# Altium PCB Cabinet_Device.PcbDoc (part 3 of 4)
Units mil, origin at the board's own origin, x right, y up, seen from the top; angles counter-clockwise.
Board outline 17790 x 10695 mil, 4 copper layers (Top Layer, Ground, Internal Plane 1, Bottom Layer), stack 30.634 mil thick; 515 components, 346 nets, 1467 pads, 176 vias.
Unrouted connection lines stored in the file: 677.
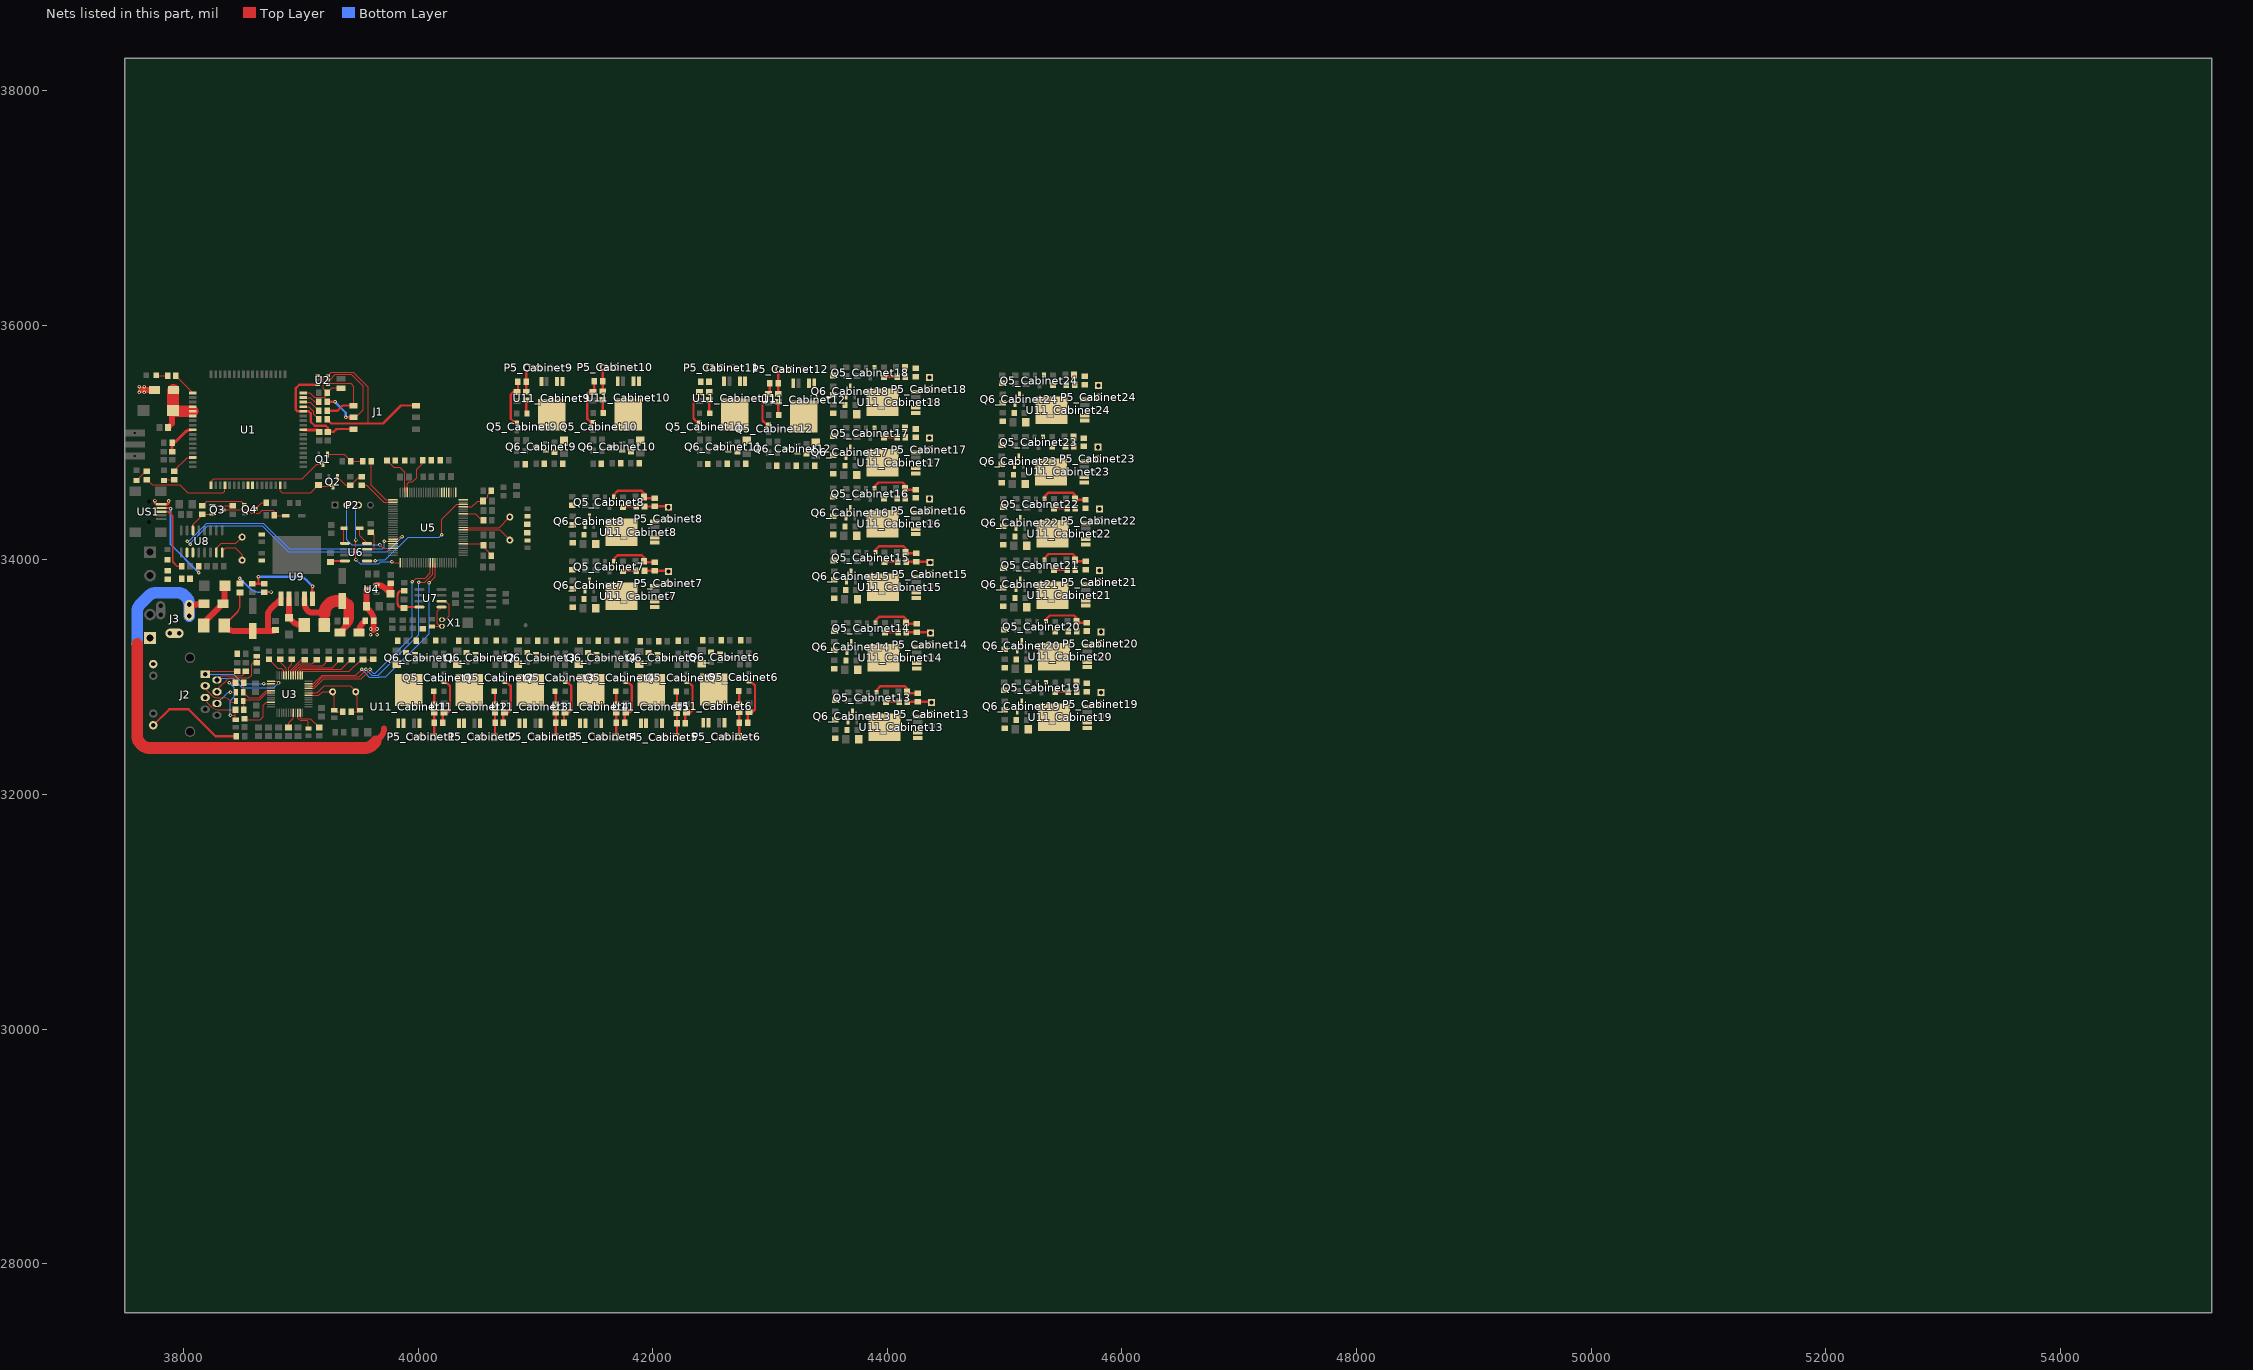
[diagram p5: the nets of this part, all layers, seen from the top]

## Via types
v1: diameter 30, hole 15, Top Layer to Bottom Layer, 176 vias

## Nets (pads, with @x,y where several pads share a name; then routed paths per layer and width w, separated by ;. In a path a pad name is that pad's centre, name@x,y a point inside that pad or via, vN(x,y) a via of type N, cw(c..) or ccw(c..) an arc to the next point about the centre after c; other vN are vias at no path point) (continued)
NetC2_1: C2.1 R1.2 U1.60 | length 289
  Top Layer w10: U1.60@38063,35107.91 U1.60@38077.56,35107.91
  Top Layer w25: C2.1@37902.43,34924.91 R1.2@37902.43,34999 ccw(c37902.43,35053.48) 37940.96,35014.96 38013.35,35087.35 cw(c38063,35037.69) U1.60@38063,35107.91
NetC3_1: C3.1 C4.1 D1.2 U1.55 U1.56 U1.57 | length 498.1
  Top Layer w50: C4.1@37869.4,35128 37902.4,35161 37902.4,35264.33 C3.1@37910.98,35272.91
  Top Layer w100: C3.1@37910.98,35272.91 37910.98,35443.19 D1.2@37915.71,35447.91 ; C3.1@37918.5,35265.39 U1.56@38077.56,35265.39
NetC5_1: C5.1 Q2.3 U1.16 | length 534.8
  Top Layer w10: U1.16@38825.59,34635.47 38825.59,34590.41 38843,34573 39084.06,34573 C5.1@39150,34638.94 39163.94,34625 Q2.3@39275,34625
NetC6_1: C6.1 U1.26 | length 141.4
  Top Layer w25: U1.26@39022.44,35107.91 39140.49,35107.91 C6.1@39157,35091.4
NetC14_1: C14.1 R20.2 R42.1 U3.37 | length 673.3
  Top Layer w10: U3.37@39013.7,33014.45 39013.7,33039.7 39023,33049 39413,33049 39513.57,33149.57 39535.43,33149.57 39613.46,33149.57 R20.2@39615.43,33147.6
NetC15_2: C15.2 R26.1 U3.30 Y1.1 | length 550.2
  Top Layer w10: U3.30@39085,32845.16 39155.16,32845.16 39186.18,32876.18 39285.43,32876.18 39285.43,32761.5 ; Y1.1@39285,32858.57 C15.2@39285,32716.5 39298.5,32703 R26.1@39359.57,32703
NetC16_2: C16.2 R26.2 U3.31 Y1.2 | length 693.4
  Top Layer w10: U3.31@39064.88,32864.84 39139.84,32864.84 39200,32925 39420,32925 39483,32862 C16.2@39483,32716.5 ; R26.2@39430.43,32703 39484.5,32703 C16.2@39502,32720.5
NetC17_2: C17.2 U3.22 | length 204
  Top Layer w10: U3.22@38974.33,32695.55 38974.33,32650.67 38995,32630 39050,32630 39065.43,32614.57 C17.2@39065.43,32561.5
NetC18_1: C18.1 U3.20 | length 143.3
  Top Layer w10: C18.1@38895.43,32568.64 38895.43,32610.43 38934.96,32649.96 U3.20@38934.96,32695.55
NetC19_2: C19.2 J2.4 R28.1 | length 562.6
  Top Layer w10: J2.4@38285.35,32875.24 38285.35,32890.35 38389,32994 38558,32994 38580,33016 38580,33109 38591.43,33120.43 R28.1@38625,33120.43 C19.2@38625,33178.5
NetC20_2: C20.2 J2.3 | length 327.9
  Top Layer w10: J2.3@38185.35,32925.24 ccw(c38247.13,32925.24) 38203.45,32881.55 38240,32845 ccw(c38288.28,32893.28) 38288.28,32825 38336.89,32825 cw(c38336.89,32744.71) 38365.13,32819.87 cw(c38336.89,32744.71) 38393.67,32801.48 38399.65,32795.5 ccw(c38425,32820.85) 38425,32785 ccw(c38425,32811.61) 38443.82,32792.79 C20.2@38447.26,32796.24
NetC21_2: C21.2 J2.6 | length 208.9
  Top Layer w10: v1(38400,32870) cw(c38402.98,32867.02) 38402.98,32871.24 C21.2@38447.26,32871.24
  Bottom Layer w10: J2.6@38285.35,32775.24 38362.52,32852.41 cw(c38405,32809.93) 38405,32870 v1(38400,32870)
NetC23_2: C23.2 J2.5 R32.1 R33.1 | length 797.1
  Top Layer w10: J2.5@38185.35,32825.24 ccw(c38247.13,32825.24) 38203.45,32781.55 38234.47,32750.53 ccw(c38305.19,32821.24) 38305.19,32721.24 R32.1@38443.32,32721.24 38443.32,32675 ; v1(38391.24,32951.24) R33.1@38443.32,32951.24 ; v1(38400,32675) 38443.32,32675 ; C23.2@38451.35,32637.73 38443.32,32645.76 38443.32,32675
  Bottom Layer w10: v1(38391.24,32951.24) 38431.24,32911.24 38431.24,32831.24 38400,32800 v1(38400,32675)
NetC24_1: C24.1 R36.2 U5.6 | length 296
  Top Layer w10: U5.6@40384.21,34137.2 40543.39,34137.2 C24.1@40556.6,34124 40556.6,34112.4 40624.43,34044.57 R36.2@40624.43,34034
NetC31_1: C31.1 LR5.2 U5.22 | length 306
  Top Layer w10: U5.22@40384.21,34452.17 40458.17,34452.17 40507,34501 C31.1@40554.6,34501 40592,34538.4 40592,34553.57 LR5.2@40625.43,34587
NetC35_1: C35.1 R39.2 U7.8 | length 357
  Top Layer w20: R39.2@39880,33734.57 39851.03,33734.57 ccw(c39851.03,33718.97) 39840,33730 ccw(c39876.21,33693.79) 39825,33693.79 39825,33629.14 ccw(c39859.14,33629.14) 39835,33605 ccw(c39877.01,33647.01) 39877.01,33587.6 C35.1@39880,33587.6 39889.4,33597 U7.8@40010.51,33597
NetC36_1: C36.1 U7.1 X1.2 | length 269.1
  Top Layer w10: C36.1@40121.5,33434 X1.2@40203,33434 ; X1.2@40184,33434 40162,33456 40162,33559.51 U7.1@40199.49,33597
NetC37_2: C37.2 R41.1 U6.4 | length 113.1
  Top Layer w20: C37.2@39262.4,33990 U6.4@39375.51,33990
NetC39_1: C39.1 U8.8 Y3.1 | length 265.9
  Top Layer w10: U8.8@38330,34061.51 38330,34074 38359,34103 38440,34103 38500,34043 Y3.1@38500,33996.5
NetC40_1: C40.1 U8.7 Y3.2 | length 296.6
  Top Layer w10: U8.7@38280,34061.51 38280,34099 38321,34140 38446.5,34140 Y3.2@38500,34193.5
NetC41_1: C41.1 C45.1 D5.1 L2.2 U9.4 | length 1068.5
  Top Layer w50: U9.4@39031.93,33668.78 39031.93,33632.77 ccw(c39127.77,33632.77) 39060,33565 ccw(c39096.21,33601.21) 39096.21,33550 39175,33550 ; D5.1@39334.29,33380 D5.1@39358.11,33403.82 ; D5.1@39358.11,33403.82 ccw(c39287.4,33474.53) 39387.4,33474.53 C45.1@39387.4,33480 39387.4,33574.88 ccw(c39287.4,33574.88) 39358.11,33645.59 C41.1@39355,33648.7 39374.85,33648.7 cw(c39374.85,33584.85) 39420,33630 cw(c39395.86,33605.86) 39430,33605.86 39430,33517.13 cw(c39330,33517.13) 39400.71,33446.42 D5.1@39358.11,33403.82
  Top Layer w100: L2.2@39201.61,33445 L2.2@39201.61,33446.96 ; 39201.61,33540.23 cw(c39313.59,33540.23) 39234.41,33619.41 cw(c39305.12,33548.7) 39305.12,33648.7 C41.1@39355,33648.7
NetC42_1: C42.1 C43.1 C44.1 L1.2 U9.1 | length 1107.3
  Top Layer w12: L1.2@38346.61,33440 38450.71,33544.1 ccw(c38380,33614.81) 38480,33614.81 C42.1@38480,33722.6
  Top Layer w50: L1.2@38346.61,33440 38363.62,33422.99 ccw(c38434.33,33493.7) 38434.33,33393.7 C43.1@38590,33393.7 38763.52,33393.7 ccw(c38763.52,33424.08) C44.1@38785,33402.6 ; 38720,33393.7 38720,33528.58 cw(c38790.15,33528.58) 38740.55,33578.19 U9.1@38831.14,33668.78
NetC42_2: C42.2 R55.1 | length 414
  Top Layer w12: C42.2@38480,33797.4 v1(38480,33842.93) ; R55.1@38690,33724.57 v1(38746.88,33724.57)
  Bottom Layer w12: v1(38480,33842.93) 38569.07,33753.86 ccw(c38639.78,33824.57) 38639.78,33724.57 v1(38746.88,33724.57)
NetC48_Cabinet1_1: C48_Cabinet1.1 Q5_Cabinet1.1 R59_Cabinet1.1 | length 424.3
  Top Layer w20: R59_Cabinet1.1@40209.87,32609 40209.87,32689.03 C48_Cabinet1.1@40219.43,32698.6 40251.03,32698.6 40271.43,32719 40271.43,32925 40238.83,32957.6 Q5_Cabinet1.1@40220.68,32957.6
NetC48_Cabinet2_1: C48_Cabinet2.1 Q5_Cabinet2.1 R59_Cabinet2.1 | length 424.3
  Top Layer w20: R59_Cabinet2.1@40726.87,32609 40726.87,32689.03 C48_Cabinet2.1@40736.43,32698.6 40768.03,32698.6 40788.43,32719 40788.43,32925 40755.83,32957.6 Q5_Cabinet2.1@40737.68,32957.6
NetC48_Cabinet3_1: C48_Cabinet3.1 Q5_Cabinet3.1 R59_Cabinet3.1 | length 424.3
  Top Layer w20: R59_Cabinet3.1@41243.87,32609 41243.87,32689.03 C48_Cabinet3.1@41253.43,32698.6 41285.03,32698.6 41305.43,32719 41305.43,32925 41272.83,32957.6 Q5_Cabinet3.1@41254.68,32957.6
NetC48_Cabinet4_1: C48_Cabinet4.1 Q5_Cabinet4.1 R59_Cabinet4.1 | length 424.3
  Top Layer w20: R59_Cabinet4.1@41760.87,32609 41760.87,32689.03 C48_Cabinet4.1@41770.43,32698.6 41802.03,32698.6 41822.43,32719 41822.43,32925 41789.83,32957.6 Q5_Cabinet4.1@41771.68,32957.6
NetC48_Cabinet5_1: C48_Cabinet5.1 Q5_Cabinet5.1 R59_Cabinet5.1 | length 424.3
  Top Layer w20: R59_Cabinet5.1@42277.87,32607.49 42277.87,32687.52 C48_Cabinet5.1@42287.43,32697.09 42319.03,32697.09 42339.43,32717.49 42339.43,32923.49 42306.83,32956.09 Q5_Cabinet5.1@42288.68,32956.09
NetC48_Cabinet6_1: C48_Cabinet6.1 Q5_Cabinet6.1 R59_Cabinet6.1 | length 424.3
  Top Layer w20: R59_Cabinet6.1@42809.87,32612.49 42809.87,32692.52 C48_Cabinet6.1@42819.43,32702.09 42851.03,32702.09 42871.43,32722.49 42871.43,32928.49 42838.83,32961.09 Q5_Cabinet6.1@42820.68,32961.09
NetC48_Cabinet7_1: C48_Cabinet7.1 Q5_Cabinet7.1 R59_Cabinet7.1 | length 424.3
  Top Layer w20: Q5_Cabinet7.1@41667.91,33988.68 41667.91,34006.83 41700.51,34039.43 41906.51,34039.43 41926.91,34019.03 C48_Cabinet7.1@41926.91,33987.43 41936.48,33977.87 R59_Cabinet7.1@42016.51,33977.87
NetC48_Cabinet8_1: C48_Cabinet8.1 Q5_Cabinet8.1 R59_Cabinet8.1 | length 424.3
  Top Layer w20: Q5_Cabinet8.1@41667.91,34536.68 41667.91,34554.83 41700.51,34587.43 41906.51,34587.43 41926.91,34567.03 C48_Cabinet8.1@41926.91,34535.43 41936.48,34525.87 R59_Cabinet8.1@42016.51,34525.87
NetC48_Cabinet9_1: C48_Cabinet9.1 Q5_Cabinet9.1 R59_Cabinet9.1 | length 424.3
  Top Layer w20: Q5_Cabinet9.1@40840.32,35169.91 40822.17,35169.91 40789.57,35202.51 40789.57,35408.51 40809.97,35428.91 C48_Cabinet9.1@40841.57,35428.91 40851.13,35438.48 R59_Cabinet9.1@40851.13,35518.51
NetC48_Cabinet10_1: C48_Cabinet10.1 Q5_Cabinet10.1 R59_Cabinet10.1 | length 424.3
  Top Layer w20: Q5_Cabinet10.1@41491.32,35172.91 41473.17,35172.91 41440.57,35205.51 41440.57,35411.51 41460.97,35431.91 C48_Cabinet10.1@41492.57,35431.91 41502.13,35441.48 R59_Cabinet10.1@41502.13,35521.51
NetC48_Cabinet11_1: C48_Cabinet11.1 Q5_Cabinet11.1 R59_Cabinet11.1 | length 270.3
  Top Layer w20: 42347.57,35409.51 42347.57,35203.51 42380.17,35170.91 Q5_Cabinet11.1@42398.32,35170.91
NetC48_Cabinet12_1: C48_Cabinet12.1 Q5_Cabinet12.1 R59_Cabinet12.1 | length 424.3
  Top Layer w20: Q5_Cabinet12.1@42987.32,35154.91 42969.17,35154.91 42936.57,35187.51 42936.57,35393.51 42956.97,35413.91 C48_Cabinet12.1@42988.57,35413.91 42998.13,35423.48 R59_Cabinet12.1@42998.13,35503.51
NetC48_Cabinet13_1: C48_Cabinet13.1 Q5_Cabinet13.1 R59_Cabinet13.1 | length 424.3
  Top Layer w20: Q5_Cabinet13.1@43909.43,32872.44 43909.43,32890.6 43942.02,32923.2 44148.02,32923.2 44168.43,32902.79 C48_Cabinet13.1@44168.43,32871.2 44177.99,32861.63 R59_Cabinet13.1@44258.02,32861.63
NetC48_Cabinet14_1: C48_Cabinet14.1 Q5_Cabinet14.1 R59_Cabinet14.1 | length 424.3
  Top Layer w20: Q5_Cabinet14.1@43900.4,33464.68 43900.4,33482.83 43933,33515.43 44139,33515.43 44159.4,33495.03 C48_Cabinet14.1@44159.4,33463.43 44168.97,33453.87 R59_Cabinet14.1@44249,33453.87
NetC48_Cabinet15_1: C48_Cabinet15.1 Q5_Cabinet15.1 R59_Cabinet15.1 | length 424.3
  Top Layer w20: Q5_Cabinet15.1@43897.91,34065.68 43897.91,34083.83 43930.51,34116.43 44136.51,34116.43 44156.91,34096.03 C48_Cabinet15.1@44156.91,34064.43 44166.48,34054.87 R59_Cabinet15.1@44246.51,34054.87
NetC48_Cabinet16_1: C48_Cabinet16.1 Q5_Cabinet16.1 R59_Cabinet16.1 | length 424.3
  Top Layer w20: Q5_Cabinet16.1@43891.91,34608.68 43891.91,34626.83 43924.51,34659.43 44130.51,34659.43 44150.91,34639.03 C48_Cabinet16.1@44150.91,34607.43 44160.48,34597.87 R59_Cabinet16.1@44240.51,34597.87
NetC48_Cabinet17_1: C48_Cabinet17.1 Q5_Cabinet17.1 R59_Cabinet17.1
NetC48_Cabinet18_1: C48_Cabinet18.1 Q5_Cabinet18.1 R59_Cabinet18.1
NetC48_Cabinet19_1: C48_Cabinet19.1 Q5_Cabinet19.1 R59_Cabinet19.1
NetC48_Cabinet20_1: C48_Cabinet20.1 Q5_Cabinet20.1 R59_Cabinet20.1 | length 424.3
  Top Layer w20: Q5_Cabinet20.1@45352.91,33474.68 45352.91,33492.83 45385.51,33525.43 45591.51,33525.43 45611.91,33505.03 C48_Cabinet20.1@45611.91,33473.43 45621.48,33463.87 R59_Cabinet20.1@45701.51,33463.87
NetC48_Cabinet21_1: C48_Cabinet21.1 Q5_Cabinet21.1 R59_Cabinet21.1 | length 424.3
  Top Layer w20: Q5_Cabinet21.1@45341.4,33998.68 45341.4,34016.83 45374,34049.43 45580,34049.43 45600.4,34029.03 C48_Cabinet21.1@45600.4,33997.43 45609.97,33987.87 R59_Cabinet21.1@45690,33987.87
NetC48_Cabinet22_1: C48_Cabinet22.1 Q5_Cabinet22.1 R59_Cabinet22.1 | length 424.3
  Top Layer w20: Q5_Cabinet22.1@45340.91,34521.68 45340.91,34539.83 45373.51,34572.43 45579.51,34572.43 45599.91,34552.03 C48_Cabinet22.1@45599.91,34520.43 45609.48,34510.87 R59_Cabinet22.1@45689.51,34510.87
NetC48_Cabinet23_1: C48_Cabinet23.1 Q5_Cabinet23.1 R59_Cabinet23.1
NetC48_Cabinet24_1: C48_Cabinet24.1 Q5_Cabinet24.1 R59_Cabinet24.1
NetCP3_1: CP3.1 LR3.2 U4.2 | length 235.8
  Top Layer w50: U4.2@39646.34,33787.4 cw(c39646.34,33687.51) 39716.97,33758.14 CP3.1@39765,33710.12 LR3.2@39765,33799.57
NetD2_1: D2.1 U6.1 | length 131.1
  Top Layer w10: D2.1@39368.07,34268 39368.07,34147.44 U6.1@39375.51,34140
NetD2_2: D2.2 U6.8 | length 153.9
  Top Layer w10: D2.2@39501.93,34268 39501.93,34205.07 39564.49,34142.51 U6.8@39564.49,34140
NetD3_2: D3.2 Q3.3 R46.1 | length 600.4
  Top Layer w10: Q3.3@38331.34,34425 38331.34,34425.33 38549.67,34425.33 38577,34398 38645,34398 38670,34423 38761,34423 38775.43,34408.57 R46.1@38775.43,34380 38780.43,34375 D3.2@38873.07,34375
NetD4_2: D4.2 D6.2 L1.1 | length 362
  Top Layer w50: L1.1@38173.39,33440 cw(c38229.84,33440) 38189.92,33479.92 38334.5,33624.5 cw(c38335.71,33623.29) D4.2@38335.71,33625 ; D4.2@38350.71,33630 D6.2@38350.71,33741.85
NetD5_2: D5.2 LR8.1 | length 118
  Top Layer w50: D5.2@39495.71,33380 39495.71,33384.72 cw(c39595.71,33384.72) 39525,33455.43 LR8.1@39549.57,33480
NetD7_2: D7.2 L2.1 U9.2 | length 313
  Top Layer w50: U9.2@38898.07,33668.78 38898.07,33510.13 ccw(c38904.66,33510.13) D7.2@38900,33505.47 ; D7.2@38900,33505.47 38931.18,33474.29 ccw(c39001.89,33545) 39001.89,33445 L2.1@39028.39,33445
NetJ1_2: J1.2 R12.2 U2.5 | length 993.6
  Top Layer w10: U2.5@39232.29,35532 39246,35532 39295,35581 39431,35581 39532,35480 39532,35280 J1.2@39467,35215
  Top Layer w20: R12.2@39225.43,35346.34 v1(39291.66,35346.34) ; v1(39384,35214) J1.2@39450,35214 ; J1.2@39430,35215 J1.2@39467,35215
  Bottom Layer w20: v1(39291.66,35346.34) 39384,35254 v1(39384,35214)
NetJ1_3: J1.3@39450,35314 R11.2 U2.4 | length 621.3
  Top Layer w10: U2.4@39232.29,35494.6 39241.69,35504 39425,35504 39452,35477 39452,35316 J1.3@39450,35314
  Top Layer w20: R11.2@39225.43,35271.34 39313.34,35271.34 39357,35315 J1.3@39430,35315
NetJ1_7: J1.7 R8.2 U2.6 | length 1526.8
  Top Layer w10: U2.6@39232.29,35569.4 39259.89,35597 39446,35597 39574,35469 39574,35162
  Top Layer w20: R8.2@39225.43,35196.34 39259.77,35162 39574,35162 39700,35162 39853,35315 J1.7@39961.5,35315
NetJ2_9: J2.9 R34.2
NetJ2_12: J2.12 R35.2 | length 859.5
  Top Layer w20: J2.12@37742.44,32589.24 37878.21,32725 38045,32725 38273.76,32496.24 R35.2@38450.92,32496.24
NetJ3_3: J3.3 J3.3A J3.3B
NetLED1_1: LED1.1 R2.2 | length 93.3
  Top Layer w10: LED1.1@37833,34675.41 37841.07,34683.48 R2.2@37923,34683.48
NetLED2_1: LED2.1 R3.1 | length 98.1
  Top Layer w10: LED2.1@37768.5,35572.91 37773.5,35567.91 R3.1@37864.57,35567.91
NetLED3_1: LED3.1 R6.2 | length 122.7
  Top Layer w10: LED3.1@37598,34675.41 37676.94,34754.35 R6.2@37688,34754.35
NetLED4_1: LED4.1 R41.2 R54.2
NetLED5_Cabinet1_2: LED5_Cabinet1.2 R58_Cabinet1.2 | length 114.8
  Top Layer w20: LED5_Cabinet1.2@40132.93,32879 40138.43,32873.5 R58_Cabinet1.2@40138.43,32766.43
NetLED5_Cabinet2_2: LED5_Cabinet2.2 R58_Cabinet2.2 | length 114.8
  Top Layer w20: LED5_Cabinet2.2@40649.93,32879 40655.43,32873.5 R58_Cabinet2.2@40655.43,32766.43
NetLED5_Cabinet3_2: LED5_Cabinet3.2 R58_Cabinet3.2 | length 114.8
  Top Layer w20: LED5_Cabinet3.2@41166.93,32879 41172.43,32873.5 R58_Cabinet3.2@41172.43,32766.43
NetLED5_Cabinet4_2: LED5_Cabinet4.2 R58_Cabinet4.2 | length 114.8
  Top Layer w20: LED5_Cabinet4.2@41683.93,32879 41689.43,32873.5 R58_Cabinet4.2@41689.43,32766.43
NetLED5_Cabinet5_2: LED5_Cabinet5.2 R58_Cabinet5.2 | length 114.8
  Top Layer w20: LED5_Cabinet5.2@42200.93,32877.49 42206.43,32871.98 R58_Cabinet5.2@42206.43,32764.92
NetLED5_Cabinet6_2: LED5_Cabinet6.2 R58_Cabinet6.2 | length 114.8
  Top Layer w20: LED5_Cabinet6.2@42732.93,32882.49 42738.43,32876.98 R58_Cabinet6.2@42738.43,32769.92
NetLED5_Cabinet7_2: LED5_Cabinet7.2 R58_Cabinet7.2 | length 114.8
  Top Layer w20: LED5_Cabinet7.2@41746.51,33900.93 41752.02,33906.43 R58_Cabinet7.2@41859.08,33906.43
NetLED5_Cabinet8_2: LED5_Cabinet8.2 R58_Cabinet8.2 | length 114.8
  Top Layer w20: LED5_Cabinet8.2@41746.51,34448.93 41752.02,34454.43 R58_Cabinet8.2@41859.08,34454.43
NetLED5_Cabinet9_2: LED5_Cabinet9.2 R58_Cabinet9.2 | length 114.8
  Top Layer w20: R58_Cabinet9.2@40922.57,35361.08 40922.57,35254.02 LED5_Cabinet9.2@40928.07,35248.51
NetLED5_Cabinet10_2: LED5_Cabinet10.2 R58_Cabinet10.2 | length 114.8
  Top Layer w20: R58_Cabinet10.2@41573.57,35364.08 41573.57,35257.02 LED5_Cabinet10.2@41579.07,35251.51
NetLED5_Cabinet11_2: LED5_Cabinet11.2 R58_Cabinet11.2 | length 114.8
  Top Layer w20: R58_Cabinet11.2@42480.57,35362.08 42480.57,35255.02 LED5_Cabinet11.2@42486.07,35249.51
NetLED5_Cabinet12_2: LED5_Cabinet12.2 R58_Cabinet12.2 | length 114.8
  Top Layer w20: R58_Cabinet12.2@43069.57,35346.08 43069.57,35239.02 LED5_Cabinet12.2@43075.07,35233.51
NetLED5_Cabinet13_2: LED5_Cabinet13.2 R58_Cabinet13.2 | length 114.8
  Top Layer w20: LED5_Cabinet13.2@43988.02,32784.69 43993.53,32790.2 R58_Cabinet13.2@44100.59,32790.2
NetLED5_Cabinet14_2: LED5_Cabinet14.2 R58_Cabinet14.2 | length 114.8
  Top Layer w20: LED5_Cabinet14.2@43979,33376.93 43984.5,33382.43 R58_Cabinet14.2@44091.57,33382.43
NetLED5_Cabinet15_2: LED5_Cabinet15.2 R58_Cabinet15.2 | length 114.8
  Top Layer w20: LED5_Cabinet15.2@43976.51,33977.93 43982.02,33983.43 R58_Cabinet15.2@44089.08,33983.43
NetLED5_Cabinet16_2: LED5_Cabinet16.2 R58_Cabinet16.2
NetLED5_Cabinet17_2: LED5_Cabinet17.2 R58_Cabinet17.2 | length 114.8
  Top Layer w20: LED5_Cabinet17.2@43970.51,35037.93 43976.02,35043.43 R58_Cabinet17.2@44083.08,35043.43
NetLED5_Cabinet18_2: LED5_Cabinet18.2 R58_Cabinet18.2 | length 114.8
  Top Layer w20: LED5_Cabinet18.2@43970.51,35554.93 43976.02,35560.43 R58_Cabinet18.2@44083.08,35560.43
NetLED5_Cabinet19_2: LED5_Cabinet19.2 R58_Cabinet19.2 | length 114.8
  Top Layer w20: LED5_Cabinet19.2@45431.51,32869.93 45437.02,32875.43 R58_Cabinet19.2@45544.08,32875.43
NetLED5_Cabinet20_2: LED5_Cabinet20.2 R58_Cabinet20.2
NetLED5_Cabinet21_2: LED5_Cabinet21.2 R58_Cabinet21.2 | length 114.8
  Top Layer w20: LED5_Cabinet21.2@45420,33910.93 45425.5,33916.43 R58_Cabinet21.2@45532.57,33916.43
NetLED5_Cabinet22_2: LED5_Cabinet22.2 R58_Cabinet22.2 | length 114.8
  Top Layer w20: LED5_Cabinet22.2@45419.51,34433.93 45425.02,34439.43 R58_Cabinet22.2@45532.08,34439.43
NetLED5_Cabinet23_2: LED5_Cabinet23.2 R58_Cabinet23.2
NetLED5_Cabinet24_2: LED5_Cabinet24.2 R58_Cabinet24.2
NetLED6_Cabinet1_1: LED6_Cabinet1.1 R62_Cabinet1.2
NetLED6_Cabinet2_1: LED6_Cabinet2.1 R62_Cabinet2.2
NetLED6_Cabinet3_1: LED6_Cabinet3.1 R62_Cabinet3.2
NetLED6_Cabinet4_1: LED6_Cabinet4.1 R62_Cabinet4.2
NetLED6_Cabinet5_1: LED6_Cabinet5.1 R62_Cabinet5.2
NetLED6_Cabinet6_1: LED6_Cabinet6.1 R62_Cabinet6.2
NetLED6_Cabinet7_1: LED6_Cabinet7.1 R62_Cabinet7.2
NetLED6_Cabinet8_1: LED6_Cabinet8.1 R62_Cabinet8.2
NetLED6_Cabinet9_1: LED6_Cabinet9.1 R62_Cabinet9.2
NetLED6_Cabinet10_1: LED6_Cabinet10.1 R62_Cabinet10.2
NetLED6_Cabinet11_1: LED6_Cabinet11.1 R62_Cabinet11.2
NetLED6_Cabinet12_1: LED6_Cabinet12.1 R62_Cabinet12.2
NetLED6_Cabinet13_1: LED6_Cabinet13.1 R62_Cabinet13.2
NetLED6_Cabinet14_1: LED6_Cabinet14.1 R62_Cabinet14.2
NetLED6_Cabinet15_1: LED6_Cabinet15.1 R62_Cabinet15.2
NetLED6_Cabinet16_1: LED6_Cabinet16.1 R62_Cabinet16.2
NetLED6_Cabinet17_1: LED6_Cabinet17.1 R62_Cabinet17.2
NetLED6_Cabinet18_1: LED6_Cabinet18.1 R62_Cabinet18.2
NetLED6_Cabinet19_1: LED6_Cabinet19.1 R62_Cabinet19.2
NetLED6_Cabinet20_1: LED6_Cabinet20.1 R62_Cabinet20.2
NetLED6_Cabinet21_1: LED6_Cabinet21.1 R62_Cabinet21.2
NetLED6_Cabinet22_1: LED6_Cabinet22.1 R62_Cabinet22.2
NetLED6_Cabinet23_1: LED6_Cabinet23.1 R62_Cabinet23.2
NetLED6_Cabinet24_1: LED6_Cabinet24.1 R62_Cabinet24.2
NetLR6_1: LR6.1 U5.19 | length 195.8
  Top Layer w10: U5.19@40384.21,34393.11 40486.89,34393.11 40541,34339 LR6.1@40557.57,34339
NetP5_Cabinet1_1: P5_Cabinet1.1 R58_Cabinet1.1 R59_Cabinet1.2 | length 218.6
  Top Layer w20: P5_Cabinet1.1@40110.43,32489 40139,32517.57 R59_Cabinet1.2@40139,32609 40138.43,32609.57 R58_Cabinet1.1@40138.43,32695.57
NetP5_Cabinet1_2: P5_Cabinet1.2 U11_Cabinet1.1 U11_Cabinet1.5
NetP5_Cabinet2_1: P5_Cabinet2.1 R58_Cabinet2.1 R59_Cabinet2.2 | length 218.6
  Top Layer w20: P5_Cabinet2.1@40627.43,32489 40656,32517.57 R59_Cabinet2.2@40656,32609 40655.43,32609.57 R58_Cabinet2.1@40655.43,32695.57
NetP5_Cabinet2_2: P5_Cabinet2.2 U11_Cabinet2.1 U11_Cabinet2.5
NetP5_Cabinet3_1: P5_Cabinet3.1 R58_Cabinet3.1 R59_Cabinet3.2 | length 218.6
  Top Layer w20: P5_Cabinet3.1@41144.43,32489 41173,32517.57 R59_Cabinet3.2@41173,32609 41172.43,32609.57 R58_Cabinet3.1@41172.43,32695.57
NetP5_Cabinet3_2: P5_Cabinet3.2 U11_Cabinet3.1 U11_Cabinet3.5
NetP5_Cabinet4_1: P5_Cabinet4.1 R58_Cabinet4.1 R59_Cabinet4.2 | length 218.6
  Top Layer w20: P5_Cabinet4.1@41661.43,32489 41690,32517.57 R59_Cabinet4.2@41690,32609 41689.43,32609.57 R58_Cabinet4.1@41689.43,32695.57
NetP5_Cabinet4_2: P5_Cabinet4.2 U11_Cabinet4.1 U11_Cabinet4.5
NetP5_Cabinet5_1: P5_Cabinet5.1 R58_Cabinet5.1 R59_Cabinet5.2 | length 218.6
  Top Layer w20: P5_Cabinet5.1@42178.43,32487.49 42207,32516.06 R59_Cabinet5.2@42207,32607.49 42206.43,32608.06 R58_Cabinet5.1@42206.43,32694.06
NetP5_Cabinet5_2: P5_Cabinet5.2 U11_Cabinet5.1 U11_Cabinet5.5
NetP5_Cabinet6_1: P5_Cabinet6.1 R58_Cabinet6.1 R59_Cabinet6.2 | length 218.6
  Top Layer w20: P5_Cabinet6.1@42710.43,32492.49 42739,32521.06 R59_Cabinet6.2@42739,32612.49 42738.43,32613.06 R58_Cabinet6.1@42738.43,32699.06
NetP5_Cabinet6_2: P5_Cabinet6.2 U11_Cabinet6.1 U11_Cabinet6.5
NetP5_Cabinet7_1: P5_Cabinet7.1 R58_Cabinet7.1 R59_Cabinet7.2 | length 218.6
  Top Layer w20: R58_Cabinet7.1@41929.94,33906.43 42015.94,33906.43 R59_Cabinet7.2@42016.51,33907 42107.94,33907 P5_Cabinet7.1@42136.51,33878.43
NetP5_Cabinet7_2: P5_Cabinet7.2 U11_Cabinet7.1 U11_Cabinet7.5
NetP5_Cabinet8_1: P5_Cabinet8.1 R58_Cabinet8.1 R59_Cabinet8.2 | length 218.6
  Top Layer w20: R58_Cabinet8.1@41929.94,34454.43 42015.94,34454.43 R59_Cabinet8.2@42016.51,34455 42107.94,34455 P5_Cabinet8.1@42136.51,34426.43
NetP5_Cabinet8_2: P5_Cabinet8.2 U11_Cabinet8.1 U11_Cabinet8.5
NetP5_Cabinet9_1: P5_Cabinet9.1 R58_Cabinet9.1 R59_Cabinet9.2 | length 218.6
  Top Layer w20: R58_Cabinet9.1@40922.57,35431.94 40922.57,35517.94 R59_Cabinet9.2@40922,35518.51 40922,35609.94 P5_Cabinet9.1@40950.57,35638.51
NetP5_Cabinet9_2: P5_Cabinet9.2 U11_Cabinet9.1 U11_Cabinet9.5
NetP5_Cabinet10_1: P5_Cabinet10.1 R58_Cabinet10.1 R59_Cabinet10.2 | length 218.6
  Top Layer w20: R58_Cabinet10.1@41573.57,35434.94 41573.57,35520.94 R59_Cabinet10.2@41573,35521.51 41573,35612.94 P5_Cabinet10.1@41601.57,35641.51
NetP5_Cabinet10_2: P5_Cabinet10.2 U11_Cabinet10.1 U11_Cabinet10.5
NetP5_Cabinet11_1: P5_Cabinet11.1 R58_Cabinet11.1 R59_Cabinet11.2
NetP5_Cabinet11_2: P5_Cabinet11.2 U11_Cabinet11.1 U11_Cabinet11.5
NetP5_Cabinet12_1: P5_Cabinet12.1 R58_Cabinet12.1 R59_Cabinet12.2 | length 218.6
  Top Layer w20: R58_Cabinet12.1@43069.57,35416.94 43069.57,35502.94 R59_Cabinet12.2@43069,35503.51 43069,35594.94 P5_Cabinet12.1@43097.57,35623.51
NetP5_Cabinet12_2: P5_Cabinet12.2 U11_Cabinet12.1 U11_Cabinet12.5
NetP5_Cabinet13_1: P5_Cabinet13.1 R58_Cabinet13.1 R59_Cabinet13.2 | length 218.6
  Top Layer w20: R58_Cabinet13.1@44171.46,32790.2 44257.46,32790.2 R59_Cabinet13.2@44258.02,32790.76 44349.46,32790.76 P5_Cabinet13.1@44378.02,32762.2
NetP5_Cabinet13_2: P5_Cabinet13.2 U11_Cabinet13.1 U11_Cabinet13.5
NetP5_Cabinet14_1: P5_Cabinet14.1 R58_Cabinet14.1 R59_Cabinet14.2 | length 218.6
  Top Layer w20: R58_Cabinet14.1@44162.43,33382.43 44248.43,33382.43 R59_Cabinet14.2@44249,33383 44340.43,33383 P5_Cabinet14.1@44369,33354.43
NetP5_Cabinet14_2: P5_Cabinet14.2 U11_Cabinet14.1 U11_Cabinet14.5
NetP5_Cabinet15_1: P5_Cabinet15.1 R58_Cabinet15.1 R59_Cabinet15.2 | length 218.6
  Top Layer w20: R58_Cabinet15.1@44159.94,33983.43 44245.94,33983.43 R59_Cabinet15.2@44246.51,33984 44337.94,33984 P5_Cabinet15.1@44366.51,33955.43
NetP5_Cabinet15_2: P5_Cabinet15.2 U11_Cabinet15.1 U11_Cabinet15.5
NetP5_Cabinet16_1: P5_Cabinet16.1 R58_Cabinet16.1 R59_Cabinet16.2
NetP5_Cabinet16_2: P5_Cabinet16.2 U11_Cabinet16.1 U11_Cabinet16.5
NetP5_Cabinet17_1: P5_Cabinet17.1 R58_Cabinet17.1 R59_Cabinet17.2
NetP5_Cabinet17_2: P5_Cabinet17.2 U11_Cabinet17.1 U11_Cabinet17.5
NetP5_Cabinet18_1: P5_Cabinet18.1 R58_Cabinet18.1 R59_Cabinet18.2
NetP5_Cabinet18_2: P5_Cabinet18.2 U11_Cabinet18.1 U11_Cabinet18.5
NetP5_Cabinet19_1: P5_Cabinet19.1 R58_Cabinet19.1 R59_Cabinet19.2
NetP5_Cabinet19_2: P5_Cabinet19.2 U11_Cabinet19.1 U11_Cabinet19.5
NetP5_Cabinet20_1: P5_Cabinet20.1 R58_Cabinet20.1 R59_Cabinet20.2
NetP5_Cabinet20_2: P5_Cabinet20.2 U11_Cabinet20.1 U11_Cabinet20.5
NetP5_Cabinet21_1: P5_Cabinet21.1 R58_Cabinet21.1 R59_Cabinet21.2
NetP5_Cabinet21_2: P5_Cabinet21.2 U11_Cabinet21.1 U11_Cabinet21.5
NetP5_Cabinet22_1: P5_Cabinet22.1 R58_Cabinet22.1 R59_Cabinet22.2
NetP5_Cabinet22_2: P5_Cabinet22.2 U11_Cabinet22.1 U11_Cabinet22.5
NetP5_Cabinet23_1: P5_Cabinet23.1 R58_Cabinet23.1 R59_Cabinet23.2
NetP5_Cabinet23_2: P5_Cabinet23.2 U11_Cabinet23.1 U11_Cabinet23.5
NetP5_Cabinet24_1: P5_Cabinet24.1 R58_Cabinet24.1 R59_Cabinet24.2
NetP5_Cabinet24_2: P5_Cabinet24.2 U11_Cabinet24.1 U11_Cabinet24.5
NetQ1_1: Q1.1 R4.1 R5.1 | length 325.5
  Top Layer w10: Q1.1@39227.4,34897.68 39369.09,34897.68 R5.1@39425.43,34841.34 R4.1@39529.57,34841.34
NetQ1_3: Q1.3 U1.1 | length 1049.6
  Top Layer w10: U1.1@38235.04,34635.47 38235.04,34670.04 38257,34692 39012,34692 39135,34815 Q1.3@39190,34815
NetQ2_1: Q2.1 R9.1 R10.1 | length 266.7
  Top Layer w10: Q2.1@39312.4,34707.68 39384.17,34635.91 R10.1@39420,34635.91 39427.91,34635.91 39498.77,34706.77 R9.1@39520,34706.77
NetQ3_1: Q3.1 R47.2 | length 172.2
  Top Layer w10: Q3.1@38248.66,34462.4 38250.63,34460.43 R47.2@38420,34460.43
NetQ4_1: Q4.1 R48.2 | length 384.7
  Top Layer w10: R48.2@38160,34460.43 38198.57,34499 38491.16,34499 Q4.1@38517.76,34472.4
NetQ4_3: Q4.3 R49.2 | length 114.3
  Top Layer w10: Q4.3@38612.24,34432 38665.24,34485 R49.2@38704.57,34485
NetQ6_Cabinet1_1: Q6_Cabinet1.1 R61_Cabinet1.1 R63_Cabinet1.2
NetQ6_Cabinet1_3: Q6_Cabinet1.3 U11_Cabinet1.2
NetQ6_Cabinet2_1: Q6_Cabinet2.1 R61_Cabinet2.1 R63_Cabinet2.2
NetQ6_Cabinet2_3: Q6_Cabinet2.3 U11_Cabinet2.2
NetQ6_Cabinet3_1: Q6_Cabinet3.1 R61_Cabinet3.1 R63_Cabinet3.2
NetQ6_Cabinet3_3: Q6_Cabinet3.3 U11_Cabinet3.2
NetQ6_Cabinet4_1: Q6_Cabinet4.1 R61_Cabinet4.1 R63_Cabinet4.2
NetQ6_Cabinet4_3: Q6_Cabinet4.3 U11_Cabinet4.2
NetQ6_Cabinet5_1: Q6_Cabinet5.1 R61_Cabinet5.1 R63_Cabinet5.2
NetQ6_Cabinet5_3: Q6_Cabinet5.3 U11_Cabinet5.2
NetQ6_Cabinet6_1: Q6_Cabinet6.1 R61_Cabinet6.1 R63_Cabinet6.2
NetQ6_Cabinet6_3: Q6_Cabinet6.3 U11_Cabinet6.2
NetQ6_Cabinet7_1: Q6_Cabinet7.1 R61_Cabinet7.1 R63_Cabinet7.2
NetQ6_Cabinet7_3: Q6_Cabinet7.3 U11_Cabinet7.2
NetQ6_Cabinet8_1: Q6_Cabinet8.1 R61_Cabinet8.1 R63_Cabinet8.2
NetQ6_Cabinet8_3: Q6_Cabinet8.3 U11_Cabinet8.2
NetQ6_Cabinet9_1: Q6_Cabinet9.1 R61_Cabinet9.1 R63_Cabinet9.2
NetQ6_Cabinet9_3: Q6_Cabinet9.3 U11_Cabinet9.2
NetQ6_Cabinet10_1: Q6_Cabinet10.1 R61_Cabinet10.1 R63_Cabinet10.2
NetQ6_Cabinet10_3: Q6_Cabinet10.3 U11_Cabinet10.2
NetQ6_Cabinet11_1: Q6_Cabinet11.1 R61_Cabinet11.1 R63_Cabinet11.2
NetQ6_Cabinet11_3: Q6_Cabinet11.3 U11_Cabinet11.2
NetQ6_Cabinet12_1: Q6_Cabinet12.1 R61_Cabinet12.1 R63_Cabinet12.2
NetQ6_Cabinet12_3: Q6_Cabinet12.3 U11_Cabinet12.2
NetQ6_Cabinet13_1: Q6_Cabinet13.1 R61_Cabinet13.1 R63_Cabinet13.2
NetQ6_Cabinet13_3: Q6_Cabinet13.3 U11_Cabinet13.2
NetQ6_Cabinet14_1: Q6_Cabinet14.1 R61_Cabinet14.1 R63_Cabinet14.2
NetQ6_Cabinet14_3: Q6_Cabinet14.3 U11_Cabinet14.2
NetQ6_Cabinet15_1: Q6_Cabinet15.1 R61_Cabinet15.1 R63_Cabinet15.2
NetQ6_Cabinet15_3: Q6_Cabinet15.3 U11_Cabinet15.2
NetQ6_Cabinet16_1: Q6_Cabinet16.1 R61_Cabinet16.1 R63_Cabinet16.2
NetQ6_Cabinet16_3: Q6_Cabinet16.3 U11_Cabinet16.2
NetQ6_Cabinet17_1: Q6_Cabinet17.1 R61_Cabinet17.1 R63_Cabinet17.2
NetQ6_Cabinet17_3: Q6_Cabinet17.3 U11_Cabinet17.2
NetQ6_Cabinet18_1: Q6_Cabinet18.1 R61_Cabinet18.1 R63_Cabinet18.2
NetQ6_Cabinet18_3: Q6_Cabinet18.3 U11_Cabinet18.2
NetQ6_Cabinet19_1: Q6_Cabinet19.1 R61_Cabinet19.1 R63_Cabinet19.2
NetQ6_Cabinet19_3: Q6_Cabinet19.3 U11_Cabinet19.2
NetQ6_Cabinet20_1: Q6_Cabinet20.1 R61_Cabinet20.1 R63_Cabinet20.2
NetQ6_Cabinet20_3: Q6_Cabinet20.3 U11_Cabinet20.2
NetQ6_Cabinet21_1: Q6_Cabinet21.1 R61_Cabinet21.1 R63_Cabinet21.2
NetQ6_Cabinet21_3: Q6_Cabinet21.3 U11_Cabinet21.2
NetQ6_Cabinet22_1: Q6_Cabinet22.1 R61_Cabinet22.1 R63_Cabinet22.2
NetQ6_Cabinet22_3: Q6_Cabinet22.3 U11_Cabinet22.2
NetQ6_Cabinet23_1: Q6_Cabinet23.1 R61_Cabinet23.1 R63_Cabinet23.2
NetQ6_Cabinet23_3: Q6_Cabinet23.3 U11_Cabinet23.2
NetQ6_Cabinet24_1: Q6_Cabinet24.1 R61_Cabinet24.1 R63_Cabinet24.2
NetQ6_Cabinet24_3: Q6_Cabinet24.3 U11_Cabinet24.2
NetR2_1: R2.1 U1.66 | length 208.2
  Top Layer w10: R2.1@37923,34754.35 37923,34763 38031.69,34871.69 U1.66@38077.56,34871.69
NetR3_2: R3.2 U1.52 | length 203.9
  Top Layer w10: R3.2@37935.43,35567.91 38077.56,35425.79 U1.52@38077.56,35422.87
NetR6_1: R6.1 U1.4 | length 765.7
  Top Layer w10: R6.1@37688,34683.48 37733.48,34638 37970,34638 38035,34573 38340,34573 38353.15,34586.15 U1.4@38353.15,34635.47
NetR21_2: R21.2 U3.42 | length 202.5
  Top Layer w10: U3.42@38915.28,33014.45 38915.28,33060.28 39004.57,33149.57 R21.2@39035,33149.57
NetR22_2: R22.2 U3.41 | length 280.9
  Top Layer w10: U3.41@38934.96,33014.45 38934.96,33057.03 38990.93,33113 39098.43,33113 R22.2@39135,33149.57
NetR23_2: R23.2 U3.40 | length 363.9
  Top Layer w10: U3.40@38954.65,33014.45 38954.65,33054.08 38997.56,33097 39185.07,33097 R23.2@39238.87,33150.8
NetR24_2: R24.2 U3.39 | length 438.1
  Top Layer w10: U3.39@38974.33,33014.45 38974.33,33051.14 39004.19,33081 39266.43,33081 R24.2@39335,33149.57
NetR25_2: R25.2 U3.38 | length 518.8
  Top Layer w10: U3.38@38994.02,33014.45 38994.02,33048.2 39010.82,33065 39345.43,33065 R25.2@39435,33154.57
NetR27_2: R27.2 U3.10 | length 348.6
  Top Layer w10: R27.2@38521.35,32641.67 38528.02,32635 38655,32635 38680,32660 38680,32760 38706.1,32786.1 U3.10@38745.98,32786.1
NetR29_1: R29.1 U3.23 | length 236.4
  Top Layer w10: U3.23@38994.02,32695.55 38994.02,32655.98 39004,32646 39079.87,32646 R29.1@39155.43,32570.43
NetR40_1: R40.1 U6.7 | length 212.7
  Top Layer w10: U6.7@39564.49,34090 39613,34090 39627,34104 39627,34204.57 R40.1@39596,34235.57
NetR55_2: R55.2 R56.1 U9.5 | length 758.8
  Top Layer w20: R56.1@38585,33795.43 38635,33795.43 ; v1(38639.14,33855) 38639.14,33805.43 cw(c38625,33805.43) 38635,33795.43 ; R55.2@38690,33795.43 38635,33795.43 ; U9.5@39098.86,33668.78 v1@39098.86,33772.25
  Bottom Layer w20: v1(38639.14,33855) 38978.58,33855 cw(c38978.58,33755) 39049.29,33825.71 v1(39100,33775)
NetU7_2: U7.2 X1.1 | length 250.2
  Top Layer w10: U7.2@40199.49,33647 40237,33647 40266,33618 40266,33523 40233,33490 X1.1@40203,33490
OSC_IN: C33.1 R38.1 U5.12 Y2.1 | length 428.2
  Top Layer w10: U5.12@40384.21,34255.32 40696.68,34255.32 Y2.1@40778.5,34173.5
OSC_OUT: C34.1 R38.2 U5.13 Y2.2 | length 437.6
  Top Layer w10: U5.13@40384.21,34275 40384.21,34274.44 40690.44,34274.44 40777.25,34361.25 Y2.2@40785.25,34361.25
P\F\O\: U5.23 U6.5 | length 1097.2
  Top Layer w10: U6.5@39564.49,33990 39633,33990 v1(39634,33991) ; v1(40202,34213) 40202,34346 40327.85,34471.85 U5.23@40384.21,34471.85
  Bottom Layer w10: v1(39634,33991) 39655,33991 39663,33999 39722,33999 39915,34192 40181,34192 v1(40202,34213)
PMODE0: R19.2 U3.45 | length 206.9
  Top Layer w10: R19.2@38728.87,33150.8 38804.68,33075 38835,33075 38856.22,33053.78 U3.45@38856.22,33014.45
PMODE1: R18.2 U3.44 | length 157.9
  Top Layer w10: R18.2@38823.87,33150.8 38823.87,33126.13 38875.91,33074.09 U3.44@38875.91,33014.45
PMODE2: R17.2 U3.43 | length 148.1
  Top Layer w10: U3.43@38895.59,33014.45 38895.59,33080.59 38923.87,33108.87 R17.2@38923.87,33150.8
RST: Q3.2 R48.1 U8.14 | length 261.7
  Top Layer w10: U8.14@38080,34250.49 38080,34299 38160,34379 R48.1@38160,34389.57 38246.69,34389.57 Q3.2@38248.66,34387.6
RXN: C21.1 R33.2 U3.5 | length 361.2
  Top Layer w10: R33.2@38514.19,32951.24 38514.19,32875.17 C21.1@38510.25,32871.24 38556.49,32825 38647.37,32825 38706.9,32884.53 U3.5@38745.98,32884.53
RXP: C20.1 R32.2 U3.6 | length 340.2
  Top Layer w10: R32.2@38514.19,32721.24 38514.19,32786.73 ccw(c38500.75,32786.73) C20.1@38510.25,32796.24 38519.33,32805.32 38650.32,32805.32 38709.84,32864.84 U3.6@38745.98,32864.84
SIM900_RST: R9.2 U5.52 | length 325.6
  Top Layer w10: R9.2@39520,34635.91 39562.09,34635.91 39706.46,34491.54 U5.52@39785.79,34491.54
SIM900_RXD: R14.2 R16.1 U1.10
SIM900_TXD: R13.2 R15.1 U1.9
SIM_CLK: R11.1 U1.32 | length 162.3
  Top Layer w10: U1.32@39022.44,35344.13 39081.77,35344.13 R11.1@39154.57,35271.34
SIM_DATA: R8.1 U1.31 | length 189.4
  Top Layer w10: U1.31@39022.44,35304.76 39067.24,35304.76 39109,35263 39109,35241.91 R8.1@39154.57,35196.34
SIM_PRE: J1.4 R7.2 U1.34 U2.1 | length 547.1
  Top Layer w10: U1.34@39022.44,35422.87 39075.13,35422.87 39112.56,35385.44 39205.54,35385.44 39225.43,35405.33 R7.2@39225.43,35424 ; U2.1@39143.71,35569.4 39159.6,35569.4 39191,35538 39191,35458.43 R7.2@39225.43,35424 ; J1.4@39321.73,35464.61 39266.04,35464.61 R7.2@39225.43,35424
SIM_PWR: R4.2 U5.51 | length 442
  Top Layer w10: R4.2@39600.43,34841.34 39600.43,34636.57 39725.78,34511.22 U5.51@39785.79,34511.22
SIM_RST: R12.1 U1.33 | length 147.5
  Top Layer w10: U1.33@39022.44,35383.5 39080.5,35383.5 39117.66,35346.34 R12.1@39154.57,35346.34
SIM_VDD: C7.1 J1.1 U1.30 U2.3 | length 1005.3
  Top Layer w20: U2.3@39143.71,35494.6 39142.11,35493 38986,35493 38958,35465 38958,35280 38972.61,35265.39 U1.30@39022.44,35265.39 39068.61,35265.39 39084,35250 39084,35177 39119,35142 39213,35142 39230,35125 C7.1@39230,35091.4 39281.4,35091.4 39305,35115 J1.1@39430,35115
SPI1_MISO: U5.31
SPI1_MOSI: U5.32
SPI1_NSS: U5.29
SPI1_SCK: U5.30
SPI3_MISO: U3.34 U5.90 | length 1862.9
  Top Layer w10: U3.34@39064.88,32923.9 39111.2,32923.9 39188.3,33001 39497,33001 39555,33059 v1(39555,33067) ; v1(40006,33809) 40056.37,33809 40124.37,33877 U5.90@40124.37,33975.79
  Bottom Layer w10: v1(39555,33067) 39555,33066.23 39605.23,33016 39661,33016 40006,33361 v1(40006,33809)
SPI3_MOSI: U3.35 U5.91 | length 1888.7
  Top Layer w10: U3.35@39064.88,32943.58 39108.26,32943.58 39181.67,33017 39469,33017 39493,33041 39493.77,33041 39509,33056.23 39509,33057 v1(39519,33067) ; v1(40094,33805) 40144.06,33855.06 U5.91@40144.06,33975.79
  Bottom Layer w10: v1(39519,33067) 39519,33066.23 39585.23,33000 39667.63,33000 39668.63,33001 39725,33001 40094,33370 v1(40094,33805)
SPI3_SCK: U3.33 U5.89 | length 1844
  Top Layer w10: U3.33@39064.88,32904.21 39114.14,32904.21 39194.93,32985 39517,32985 39591,33059 v1(39591,33067) ; v1(39951,33812) 39983,33844 40061,33844 40104.68,33887.68 U5.89@40104.68,33975.79
  Bottom Layer w10: v1(39591,33067) 39591,33059 39617,33033 39635,33033 39951,33349 v1(39951,33812)
TCK/SWCLK: P2.3 U5.76 | length 878.1
  Top Layer w10: v1(39470,34002) v1(39470,34168) ; v1(39777,33983) 39784.21,33975.79 U5.76@39848.78,33975.79
  Bottom Layer w10: v1(39470,34002) 39507,33965 39663.23,33965 39681.23,33983 v1(39777,33983) ; v1(39470,34168) 39470,34443 P2.3@39493,34466
TMS/SWDIO: P2.2 U5.72 | length 720.7
  Top Layer w10: v1(39675,34127) 39704.17,34097.83 U5.72@39785.79,34097.83
  Bottom Layer w10: P2.2@39393,34466 39392,34465 39392,34169 39434,34127 v1(39675,34127)
TXN: J2.2 R31.1 U3.1 | length 932.2
  Top Layer w10: J2.2@38285.35,32975.24 38320.12,33010 38499,33010 38531.35,33042.35 R31.1@38531.35,33050.8 ; U3.1@38745.98,32963.27 38796.73,32963.27 v1(38810,32950)
  Bottom Layer w10: J2.2@38285.35,32975.24 38300.12,32990 38420,32990 38500,32910 38770,32910 v1(38810,32950)
TXP: J2.1 R30.1 U3.2 | length 876
  Top Layer w10: J2.1@38185.35,33025.24 38210.92,33050.8 R30.1@38456.35,33050.8 ; v1(38685,32945) 38686.42,32943.58 U3.2@38745.98,32943.58
  Bottom Layer w10: J2.1@38185.35,33025.24 38429.76,33025.24 38510,32945 v1(38685,32945)
USART1_RX: U5.69 U8.2 | length 1967.2
  Top Layer w10: v1(39711,34159) 39713.11,34156.89 U5.69@39785.79,34156.89
  Bottom Layer w10: v1(38032.64,34157.36) 38034.74,34155.26 38039.74,34155.26 38196.47,34312 38682,34312 38901,34093 39695,34093 39711,34109 v1(39711,34159)
USART1_TX: U5.68 U8.3 | length 2106.1
  Top Layer w10: U5.68@39785.79,34176.57 39788.57,34179.35 39828.22,34179.35 39845.87,34197 v1(39863,34197)
  Bottom Layer w10: v1(38058.1,34131.9) 38056,34134 38056,34139 38206,34289 38672.47,34289 38891.47,34070 39736,34070 v1(39863,34197)
USART2_RX: U5.26
USART2_TX: U5.25
USART3_RX: R13.1 U5.48 | length 364.1
  Top Layer w10: R13.1@39735,34846.34 39793.34,34788 39842,34788 39885.81,34744.19 39885.81,34576.55 U5.48@39888.15,34574.21
USART3_TX: R14.1 U5.47 | length 347.2
  Top Layer w10: U5.47@39907.83,34574.21 39907.83,34646.83 39925,34664 39955,34664 39989,34698 39989,34772 40040.13,34823.13 R14.1@40040.13,34849
USB1_N: R52.2 US1.2 | length 781.6
  Top Layer w15: US1.2@37809.06,34441.5 v1@37888.5,34441.5 ; v1@37888,34434 v1(37890,34436) ; v1(38129.57,33890.43) R52.2@38129.57,33945
  Bottom Layer w15: v1(37890,34436) 37890,34130 v1(38129.57,33890.43)
USB1_P: R53.2 US1.3 | length 596.6
  Top Layer w15: US1.3@37809.06,34410 37870,34410 37908,34372 37908,33982 37945,33945 R53.2@37984.57,33945
USB_DM: U5.70
USB_DP: U5.71
VCC4V2: CP2.1 D1.1 LR8.2 U4.3 US1.1 | length 602
  Top Layer w20: US1.1@37809.06,34472.99 37860.99,34472.99
  Top Layer w25: v1(37756,34505) 37756,34485 US1.1@37764.5,34476.5 ; 37860.99,34472.99 37874,34486 v1(37874,34502)
  Top Layer w50: 37641.09,35447.91 D1.1@37754.29,35447.91 ; U4.3@39563.66,33750 ccw(c39572.79,33740.87) 39559.88,33740.87 CP2.1@39559.88,33605 ccw(c39592.77,33605) 39569.51,33581.74 39591.14,33560.12 cw(c39520.43,33489.4) 39620.43,33489.4 LR8.2@39620.43,33480 39620.43,33401.05 cw(c39618.95,33401.05) 39620,33400
  other v1: 39595,33360 39650,33360 39595,33410 39650,33410 37623,35427 37666,35427 37623,35477 37666,35477
VCC12V: CP5_Cabinet1.1 CP5_Cabinet2.1 CP5_Cabinet3.1 CP5_Cabinet4.1 CP5_Cabinet5.1 CP5_Cabinet6.1 CP5_Cabinet7.1 CP5_Cabinet8.1 CP5_Cabinet9.1 CP5_Cabinet10.1 CP5_Cabinet11.1 CP5_Cabinet12.1 CP5_Cabinet13.1 CP5_Cabinet14.1 CP5_Cabinet15.1 CP5_Cabinet16.1 CP5_Cabinet17.1 CP5_Cabinet18.1 CP5_Cabinet19.1 CP5_Cabinet20.1 CP5_Cabinet21.1 CP5_Cabinet22.1 CP5_Cabinet23.1 CP5_Cabinet24.1 D4.1 J3.1 J3.1A J3.1B P4.1 R54.1 U11_Cabinet1.3 U11_Cabinet2.3 U11_Cabinet3.3 U11_Cabinet4.3 U11_Cabinet5.3 U11_Cabinet6.3 U11_Cabinet7.3 U11_Cabinet8.3 U11_Cabinet9.3 U11_Cabinet10.3 U11_Cabinet11.3 U11_Cabinet12.3 U11_Cabinet13.3 U11_Cabinet14.3 U11_Cabinet15.3 U11_Cabinet16.3 U11_Cabinet17.3 U11_Cabinet18.3 U11_Cabinet19.3 U11_Cabinet20.3 U11_Cabinet21.3 U11_Cabinet22.3 U11_Cabinet23.3 U11_Cabinet24.3 | length 4147.5
  Top Layer w50: J3.1A@38049.37,33520.79 J3.1@38049.37,33570 38075.08,33595.71 cw(c38145.79,33525) D4.1@38145.79,33625 ; 39640,32450 39680.71,32490.71 ccw(c39610,32561.42) 39710,32561.42
  Top Layer w100: 37605,33285 37605,32501.42 ccw(c37705,32501.42) 37634.29,32430.71 37640.71,32424.29 ccw(c37711.42,32495) 37711.42,32395 39543.58,32395 ccw(c39543.58,32495) 39614.29,32424.29 39640,32450
  Bottom Layer w100: 37605,33285 37605,33553.58 cw(c37705,33553.58) 37634.29,33624.29 37700.71,33690.71 cw(c37771.42,33620) 37771.42,33720 37943.58,33720 cw(c37943.58,33620) 38014.29,33690.71 38020.08,33684.92 cw(c37949.37,33614.21) 38049.37,33614.21 J3.1@38049.37,33570 J3.1A@38049.37,33520.79